# EAGLE board hallEffect (EAGLE 6.2)
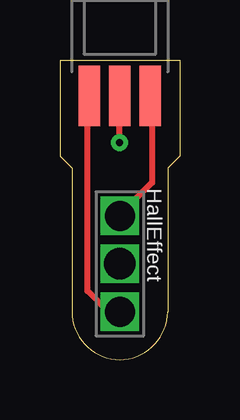
[diagram p0: board, top side]
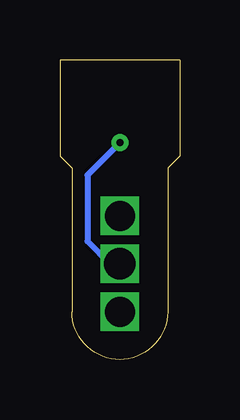
[diagram p1: board, bottom side, seen from below]

Size 5 x 12.5 mm. Coordinates in mm from the lower left corner, seen from the top.
Outline: 2.5,0 arc90 4.5,2 4.5,8 5,8.5 5,12.5 0,12.5 0,8.5 0.5,8 0.5,2 arc90 2.5,0
Copper layers (1*16): Top 0.035mm / dielectric 1.5mm / Bottom 0.035mm
Design rules: minimum track width 10mil, minimum drill 24mil, track to track 8mil, track to pad 8mil, pad to pad 8mil, via to via 8mil, smd to smd 8mil, copper to edge 40mil, drill to drill 8mil, minimum pad ring 5mil, minimum via ring 8mil, stop-mask expansion 4mil, vias tented up to drill 0mil, thermal gap 10mil

## Footprints (pad centres in the part's own frame; a part is rotated, then mirrored left to right if it is on the bottom)
SENSOR_HEADER = drill 1.25 pad 1.6 square: 1 0,2; 3 0,-2 | drill 1.3 pad 1.6 square: 2 0,0
HALL_EFFECT = smd 0.889 x 2.54: 1 -1.27,0; 2 0,0; 3 1.27,0

## Placement (x,y rotation side)
E$2  [SENSOR_HEADER]  2.5,4 0 top
E$3  [HALL_EFFECT]  2.5,11 0 top

## Library data of the parts
E$2 E$3 = appessory

## Nets
S$3: E$2.3

## Tracks (layer width: path | path; a pad name or v marks a point on that pad's centre or on a via)
S$3
  Top 0.254: E$2.3 2.01,2 1.15,2.86 1.15,11.16
S$5
  Bottom 0.254: 2.48,9.06 3.85,7.69 3.85,4.94 2.9,3.99 2.49,3.99
S$6
  Top 0.254: 3.85,10.9 3.85,7.38 2.47,6
S$8  (via drill 0.3 pad 0.5)
  Top 0.254: v2.49,9.05 2.49,11.03

## Text on the board
tPlace: HallEffect